# Altium PCB minireg-tps560430.PcbDoc
Units mm, origin at the board's own origin, x right, y up, seen from the top; angles counter-clockwise.
Board outline 10 x 10 mm, 4 copper layers (Top Layer, Mid-Layer 1, Mid-Layer 2, Bottom Layer); 8 components, 6 nets, 58 pads, 19 vias.
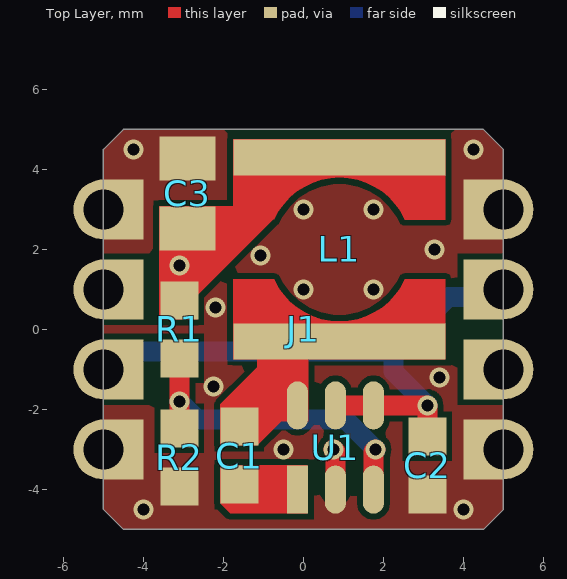
[diagram p0: Top Layer view]
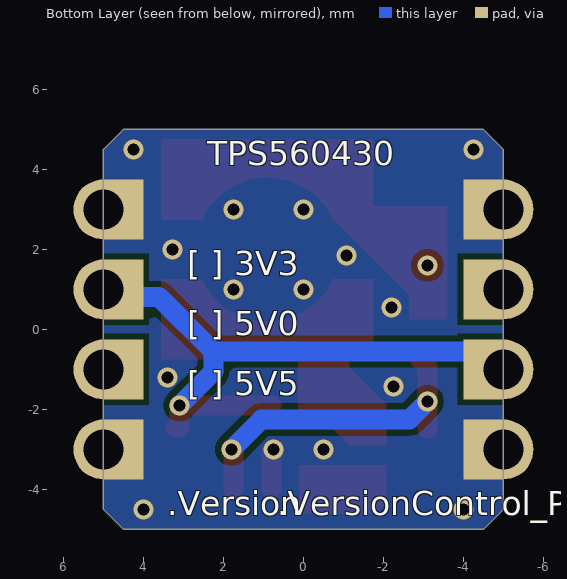
[diagram p1: Bottom Layer view, seen from below]
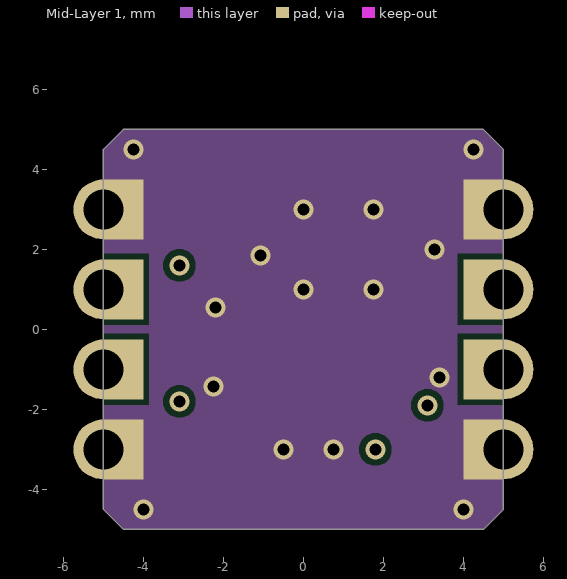
[diagram p2: Mid-Layer 1]
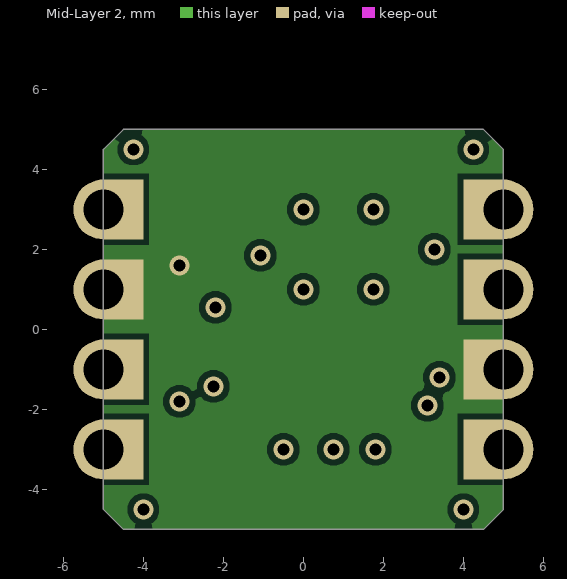
[diagram p3: Mid-Layer 2]
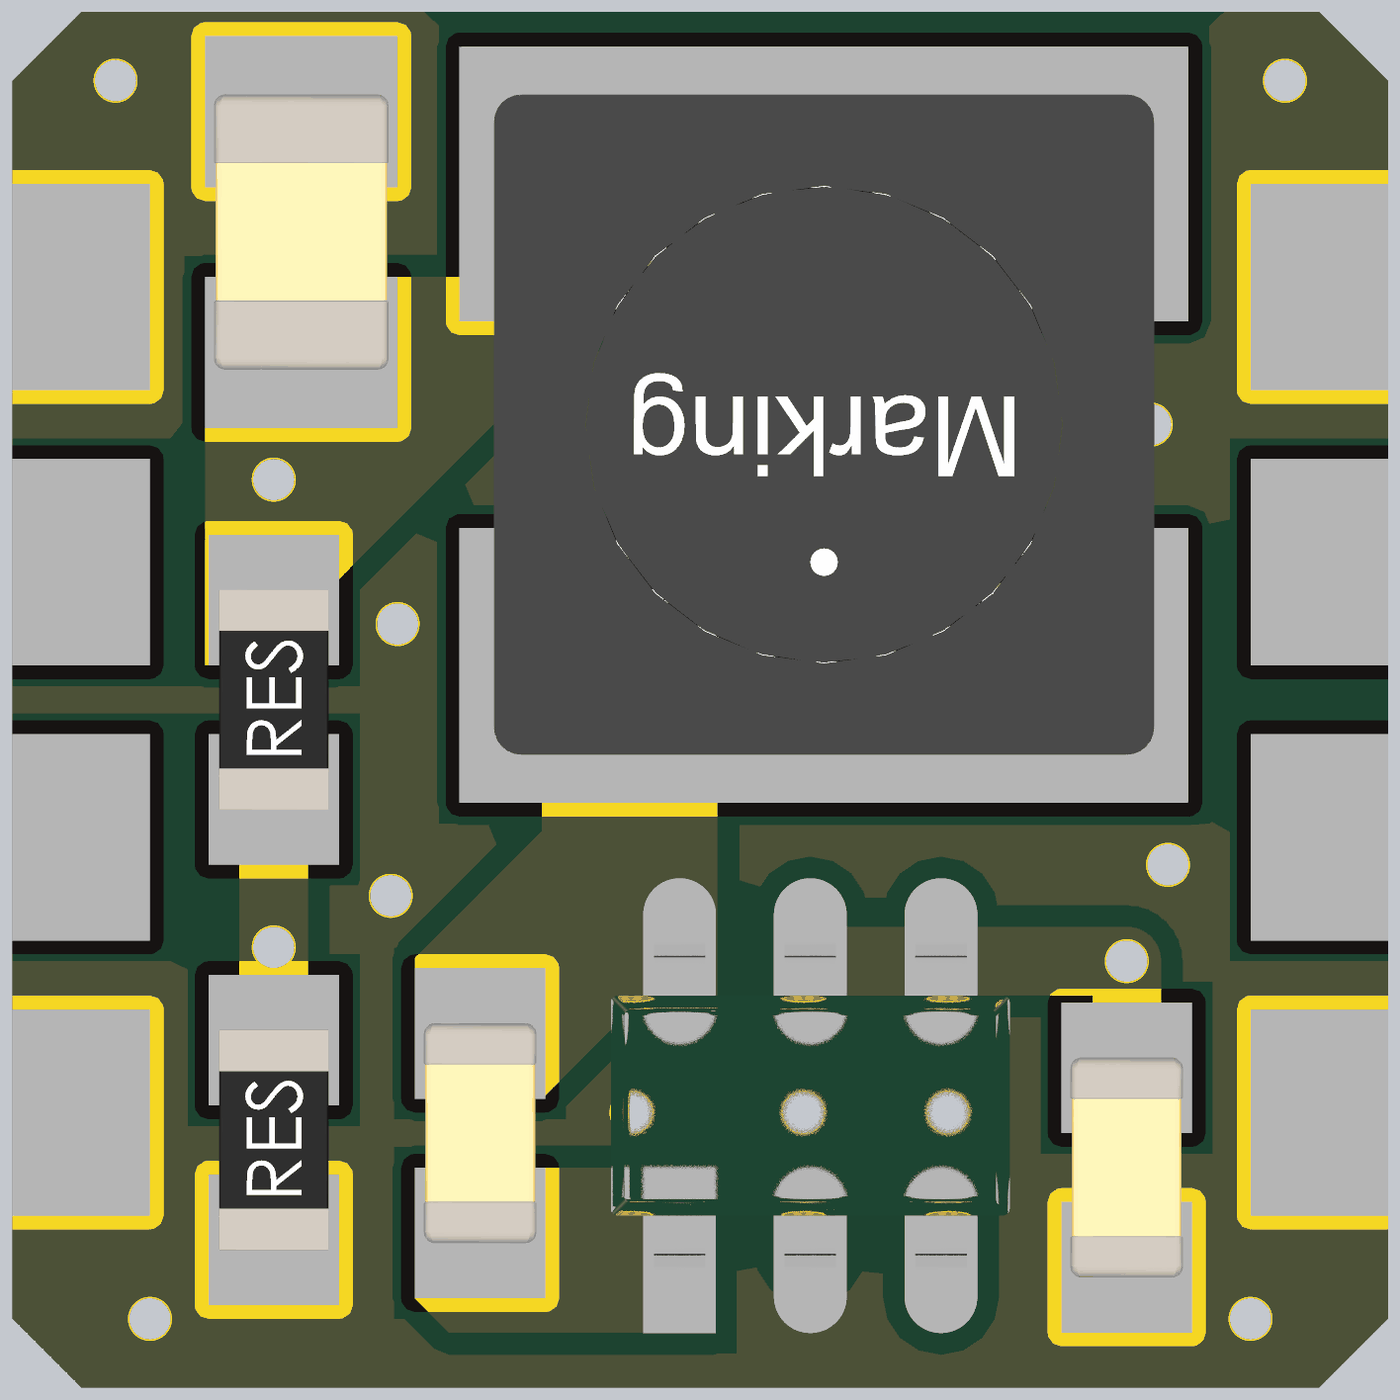
[diagram p4: 3D render of the assembled board from above, using the file's embedded part models]

## Layer stack, top to bottom
Top Solder: solder mask 0.0102, Solder Resist, Dk 3.5
Top Layer: signal copper 0.0356
Dielectric 1: dielectric 0.32, FR-4, Dk 4.8
Mid-Layer 1: signal copper 0.0356
Dielectric2: dielectric 0.32, FR-4, Dk 4.8
Mid-Layer 2: signal copper 0.0356
Dielectric3: dielectric 0.32, FR-4, Dk 4.8
Bottom Layer: signal copper 0.0356
Bottom Solder: solder mask 0.0102, Solder Resist, Dk 3.5

## Board outline
-5,-4.5 -5,4.5 -4.5,5 4.5,5 5,4.5 5,-4.5 4.5,-5 -4.5,-5

## Design rules (kind name [scope] priority, off if disabled: settings)
Clearance [All] p1: gap=0.15 ignorepadtopadclearanceinfootprint=FALSE
ComponentClearance ComponentClearance_1 [HasFootprint('MINIREG10x10')] p1: gap=0 collisioncheckmode=3 verticalgap=2540 showdistances=FALSE
ComponentClearance [All] p2: gap=0.254 collisioncheckmode=3 verticalgap=0.254 showdistances=FALSE
HoleSize [All] p1: absolutevalues=TRUE maxlimit=5 minlimit=0.3 maxpercent=80.000 minpercent=20.000
MinimumAnnularRing [All] p1: minimumring=0.1
MinimumSolderMaskSliver [All] p1: minsoldermaskwidth=0.1
PasteMaskExpansion [All] p1: expansion=0 percent=-10.000000
PolygonConnect PolygonConnect_1 [IsVia] p1: connectstyle=Direct reliefconductorwidth=0.254 reliefentries=4 polygonreliefangle="90 Angle" airgapwidth=0.254
PolygonConnect [All] p2: connectstyle=Direct reliefconductorwidth=0.254 reliefentries=4 polygonreliefangle="90 Angle" airgapwidth=0.254
RoutingVias [All] p1: holewidth=0.711 width=1.27 viastyle="Through Hole" minholewidth=0.711 minwidth=1.27 maxholewidth=0.711 maxwidth=1.27
SilkToSolderMaskClearance [IsPad] p1: minsilkscreentomaskgap=0.15 clearancetoexposedcopper=TRUE
SolderMaskExpansion [All] p1: expansion=0.1 istentingtop=FALSE
SupplyNets "Schematic Supply Nets_4" [InNet('VOUT')] p1: voltage=0.000
SupplyNets "Schematic Supply Nets_3" [InNet('VIN')] p2: voltage=0.000
SupplyNets "Schematic Supply Nets_2" [InNet('GND')] p3: voltage=0.000
Width [All] p1: maxlimit=0.5 minlimit=0.15 preferedwidth=0.2
25 further rules are at their usual default settings.

## Components (designator, comment, footprint, x,y, rotation, side; value= is the part's Value field where it differs from the comment)
C1 "CAP" CAP0603 -1.6,-3.15 r90 top value=100nF
C2 "CAP" CAP0603 3.1,-3.4 r90 top value=2.2uF
C3 "CAP" CAP0805 -2.9,3.4 r90 top value=22uF
J1 "MINIREG10x10" MINIREG8_10x10R 0,0 r0 top locked
L1 "744043270" WE-TPC_4828 0.9,2 r180 top
R1 "RES" RES0603 -3.1,0 r90 top value=51K
R2 "RES" RES0603 -3.1,-3.2 r90 top value=22.1K
U1 "TPS560430XFDBVR" FP-DBV0006A-IPC_C 0.8,-2.95 r90 top

## Footprints (in the part's own frame and the unit in brackets; to place one, negate y for a bottom-side part, rotate by r counter-clockwise, add the part's x,y. Pads: shape width x height; smd on the part's side, far side on the other; paste and mask are expansions set on the pad)
CAP0603 [mm]
  rect 0.95x0.95 smd: 1(-0.725,0) 2(0.725,0)
  body extent -0.8,-0.41 0.8,0.41, height 0.57
CAP0805 [mm]
  rect 1.1x1.4 smd: 1(0.875,0) 2(-0.875,0)
  body extent -1,-0.63 1,0.64, height 0.57
FP-DBV0006A-IPC_C [mm]
  rect 1.205x0.53 smd paste+0 mask+0: 1(-1.05,0.95)
  rrect100% 1.205x0.53 smd paste+0 mask+0: 2(-1.05,0) 3(-1.05,-0.95) 4(1.05,-0.95) 5(1.05,0) 6(1.05,0.95)
  body extent -1.75,-1.55 1.75,1.55, height 0.25
MINIREG8_10x10R [mm] "8-pin 10x10mm castellated regulator footprint"
  round 1.5 hole 1: 1(-5,-3) 2(-5,-1) 3(-5,1) 4(-5,3) 5(5,3) 6(5,1) 7(5,-1) 8(5,-3)
  rect 1x1.5 smd: 1(-4.5,-3) 2(-4.5,-1) 3(-4.5,1) 4(-4.5,3) 5(4.5,3) 6(4.5,1) 7(4.5,-1) 8(4.5,-3)
  rect 1x1.5 on Mid1: 1(-4.5,-3) 2(-4.5,-1) 3(-4.5,1) 4(-4.5,3) 5(4.5,3) 6(4.5,1) 7(4.5,-1) 8(4.5,-3)
  rect 1x1.5 smd far side: 1(-4.5,-3) 2(-4.5,-1) 3(-4.5,1) 4(-4.5,3) 5(4.5,3) 6(4.5,1) 7(4.5,-1) 8(4.5,-3)
  rect 1x1.5 on Mid2: 1(-4.5,-3) 2(-4.5,-1) 3(-4.5,1) 4(-4.5,3) 5(4.5,3) 6(4.5,1) 7(4.5,-1) 8(4.5,-3)
RES0603 [mm]
  rect 0.95x0.95 smd: 1(-0.725,0) 2(0.725,0)
  body extent -0.8,-0.4 0.8,0.4, height 0.3
WE-TPC_4828 [mm] "Power Inductor, SMD, 2-Leads, body 4.8x4.8mm"
  rect 5.3x0.9 smd paste-403.566 mask-403.566: 1(0,2.3) 2(0,-2.3)
  Top Layer region: -2.65,0.75 -1.636,0.75 -1.636,0.75 -1.138,1.394 -0.407,1.753 0.407,1.753 1.138,1.394 1.636,0.75 1.636,0.75 2.65,0.75 2.65,0.75 2.65,2.75 -2.65,2.75
  Top Layer region: 2.65,-0.75 1.636,-0.75 1.636,-0.75 1.138,-1.394 0.407,-1.753 -0.407,-1.753 -1.138,-1.394 -1.636,-0.75 -1.636,-0.75 -2.65,-0.75 -2.65,-0.75 -2.65,-2.75 2.65,-2.75
  body extent -2.4,-2.4 2.4,2.4, height 2.8

## Part data
C1: library part CAP-SM-0603-X7R-100nF, "CAP SM 0603 X7R 100nF", Manufacturer=GENERIC, Package=0603, Part Number=CAP-SM-0603-X7R-100nF
C2: library part CAP-SM-0603-X5R-2.2uF, "CAP SM 0603 X5R 2.2uF", Manufacturer=GENERIC, Package=0603, Part Number=CAP-SM-0603-X5R-2.2uF
C3: library part CAP-SM-0805-X5R-22uF, "CAP SM 0805 X5R 22uF", Manufacturer=GENERIC, Package=0805, Part Number=CAP-SM-0805-X5R-22uF
L1: Ambient Temperature Range High=95°C, Ambient Temperature Range Low=-40°C, Current Rating=890mA, DC Resistance (DCR)=170mΩ, Inductance=27µH, Max Operating Temperature=125°C, Height=2.8mm, Length=4.8mm, Min Operating Temperature=-40°C, NexarPartId=39208936, Number of Pins=2, RoHS=Compliant, Width=4.8mm
R1: library part RES-SM-0603-51K, "RES SM 0603 51K", Manufacturer=GENERIC, Package=0603, Part Number=RES-SM-0603-51K
R2: library part RES-SM-0603-22.1K, "RES SM 0603 22.1K", Manufacturer=GENERIC, Package=0603, Part Number=RES-SM-0603-22.1K
U1: "IC REG BUCK PWM 600MA SOT23-6", Case/Package=SOT-23-6, Max Input Voltage=36V, Max Operating Temperature=125°C, Max Output Voltage=34.2V, Min Input Voltage=4V, Min Operating Temperature=-40°C, Min Output Voltage=1V, Output Current=600mA, Switching Frequency=1.1MHz, Features=UVLO, Mount="Surface Mount", Number of Outputs=1, Output Configuration=Positive, Output Type=PWM, Packaging="Tape and Reel", RoHS Compliant=Yes, Synchronous Rectifier=Yes

## Via types
v1: diameter 0.5, hole 0.3, Top Layer to Bottom Layer, tented both sides, 19 vias

## Nets (pads, with @x,y where several pads share a name; then routed paths per layer and width w, separated by ;. In a path a pad name is that pad's centre, name@x,y a point inside that pad or via, vN(x,y) a via of type N, cw(c..) or ccw(c..) an arc to the next point about the centre after c; other vN are vias at no path point)
GND: C2.1 C3.1 J1.1 J1.4 J1.5 J1.8 R2.1 U1.2 | length 1
  Top Layer w0.5: v1(0.75,-3) 0.794,-3.044 0.794,-3.995 U1.2
  other v1: -4,-4.5 4,-4.5 -0.5,-3 -2.25,-1.425 3.4,-1.2 -2.2,0.55 0,1 1.75,1 -1.075,1.85 3.275,2 0,3 1.75,3 -4.25,4.5 4.25,4.5
NetC1_1: C1.1 U1.1 | length 1.7
  Top Layer w0.2: C1.1@-1.65,-3.925 C1.1
  Top Layer w0.5: C1.1@-1.65,-3.925 C1.1@-1.6,-3.975 ; C1.1 -1.537,-3.938 -0.165,-3.938 -0.15,-3.953 U1.1
NetC1_2: C1.2 L1.1 U1.6 | length 4.2
  Top Layer w0.5: C1.2 -1.075,-1.9 U1.6 -0.15,-0.5 0.05,-0.3 L1.1
NetR1_1: R1.1 R2.2 U1.3 | length 8.3
  Top Layer w0.5: R2.2 -3.1,-0.925 R1.1@-2.9,-0.725 ; U1.3 1.756,-3.995 1.756,-3.044 v1(1.8,-3)
  Bottom Layer w0.5: v1(-3.1,-1.8) -2.65,-2.25 1.05,-2.25 v1(1.8,-3)
VIN: C2.2 J1.2 J1.6 U1.4 U1.5 | length 16.5
  Top Layer w0.5: U1.5 U1.4 v1(3.1,-1.9) 3.1,-2.45 C2.2@3.2,-2.45
  Mid-Layer 2 w0.5: J1.2@-5,-1 -4.95,-0.95 J1.2@-4.5,-0.95 ; J1.6@4.809,0.809 J1.6@5,1
  Bottom Layer w0.5: J1.2@-4.809,-1.191 -5,-1 -4.55,-0.55 2.25,-0.55 ; v1(3.1,-1.9) 2.25,-1.05 2.25,-0.55 ; J1.6@5,1 4.809,0.809 3.609,0.809 2.25,-0.55
VOUT: C3.2 J1.3 J1.7 L1.2 R1.2 | length 4.3
  Top Layer w0.254: J1.7@4.275,-1 J1.7@4.763,-1
  Top Layer w0.5: R1.2 v1(-3.1,1.6) -3.1,2.225 -2.975,2.35 C3.2@-2.9,2.35 ; C3.2 -2.875,2.55 -1.45,2.55 -1,3

## Polygon pours and split planes (outlines as drawn)
GND on Top Layer "GND_L01_P000" (solid, pour order 0): -4.5,5 -5,4.5 -5,-4.5 -4.5,-5 4.5,-5 5,-4.5 5,4.5 4.5,5
GND on Mid-Layer 1 "GND_L02_P001" (solid, pour order 1): -4.5,5 -5,4.5 -5,-4.5 -4.5,-5 4.5,-5 5,-4.5 5,4.5 4.5,5
GND on Bottom Layer "GND_L04_P002" (solid, pour order 2): -4.5,5 -5,4.5 -5,-4.5 -4.5,-5 4.5,-5 5,-4.5 5,4.5 4.5,5
VOUT on Mid-Layer 2 "VOUT_L03_P003" (solid, pour order 3): -4.5,5 -5,4.5 -5,-4.5 -4.5,-5 4.5,-5 5,-4.5 5,4.5 4.5,5

## Other copper
Top Layer:
  region net VOUT: -3.6,3.075 -1.075,3.075 -0.75,2.75 -2.65,0.85 -2.65,0.25 -3.6,0.25
  region net NetC1_1: 0.1,-3.4 -2.075,-3.4 -2.075,-4.35 -1.825,-4.6 0.1,-4.6
  region net NetC1_2: -2.075,-2.9 -2.075,-1.875 -1.15,-0.95 -1.15,-0.7 0.075,-0.7 0.125,-0.75 0.125,-2.3 -0.55,-2.3 -1.15,-2.9

## Silkscreen, mask and mechanical layers (free items; w line width, h text height)
Bottom Overlay:
  text "TPS560430" at 2.4,4.1 h0.6
  text "[ ] 3V3" at 2.9,1.35 h0.6
  text "[ ] 5V0" at 2.9,-0.15 h0.6
  text "[ ] 5V5" at 2.9,-1.65 h0.6
  text ".VersionControl_ProjFolderRevNumberShort" at 0.65,-4.65 h0.6
  text ".Version" at 3.4,-4.65 h0.6
Mechanical 1:
  the board outline again, w0.1